# EAGLE board user_prog_pcb v67 (EAGLE 9.7.0)
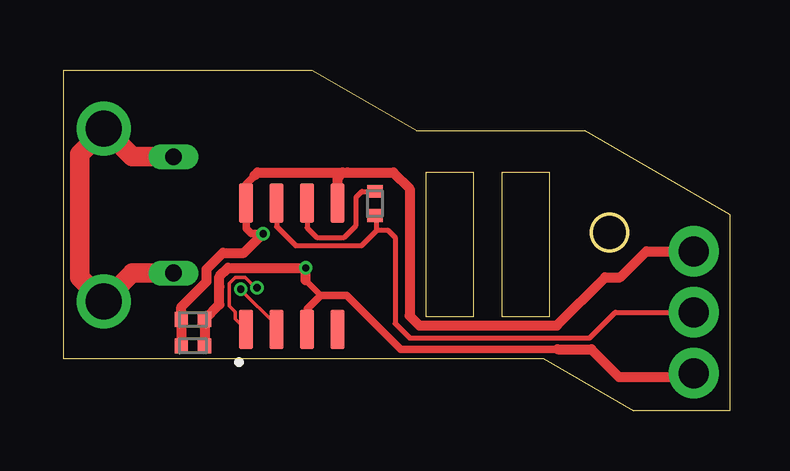
[diagram p0: board, top side]
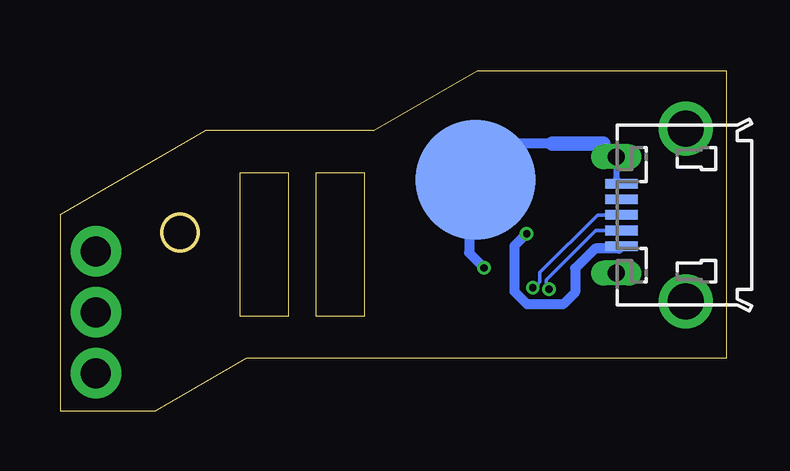
[diagram p1: board, bottom side, seen from below]

Size 27.77 x 14.18 mm. Coordinates in mm from the lower left corner, seen from the top.
Outline: 17.09,3.93 17.09,9.93 15.09,9.93 15.09,3.93 17.09,3.93
Outline: 20.26,3.93 20.26,9.93 18.26,9.93 18.26,3.93 20.26,3.93
Outline: 27.77,8.19 27.77,0 23.78,0 20,2.18 0,2.18 0,14.18 10.38,14.18 14.71,11.68 21.72,11.68 27.77,8.19
Outline: circle at 22.76,7.43 radius 0.75
Copper layers (1*16): Top 0.035mm / dielectric 1.5mm / Bottom 0.035mm
Design rules "SparkFun-2-Layer-Minimum-JLCPCB": minimum track width 5mil, minimum drill 0.3mm, track to track 5mil, track to pad 5mil, pad to pad 5mil, via to via 5mil, smd to smd 5mil, copper to edge 7mil, drill to drill 7mil, minimum pad ring 5mil, minimum via ring 5mil, stop-mask expansion 2.5mil, vias tented up to drill 25mil, thermal gap 10mil

## Footprints (pad centres in the part's own frame; a part is rotated, then mirrored left to right if it is on the bottom)
CAPC1005X60 = smd 0.56 x 0.629: 1 -0.485,0; 2 0.485,0
RESC1005X40 = smd 0.535 x 0.644: 1 -0.507,0; 2 0.507,0
1X3_POGO_PIN_HOLDER = drill 1.25 pad 2.1: P$1 -2.54,0; P$2 0,0; P$3 2.54,0
M2X2.4SMT_STANDOFF = smd 5 x 5: P$1 0,0
CH330N = smd 1.64 x 0.59: D_N -2.635,0.635; D_P -2.635,1.905; GND -2.635,-0.635; RTS# -2.635,-1.905; RXI 2.635,0.635; TXD 2.635,-0.635; V3 2.635,1.905; VCC 2.635,-1.905
ZX62D-B-5PA8 = smd 1.35 x 0.4: 1 4.825,1.3; 2 4.825,0.65; 3 4.825,0; 4 4.825,-0.65; 5 4.825,-1.3 | drill 1.5: S1 2.15,-3.6; S2 2.15,3.6 | drill 0.7 long: S3 5.05,2.425; S4 5.05,-2.425

## Placement (x,y rotation side)
C3  100nF  [CAPC1005X60]  5.4,3.81 0 top
C4  100nF  [CAPC1005X60]  5.4,2.71 0 top
R1  4.7K  [RESC1005X40]  12.98,8.64 90 top
U$1  1X3_POGO_PIN_HOLDER  [1X3_POGO_PIN_HOLDER]  26.27,4.11 90 top
U$3  M2X2.4SMT_STANDOFF  [M2X2.4SMT_STANDOFF]  10.45,9.63 0 bottom
U$6  CH330N  [CH330N]  9.52,6.02 90 top
UPDI  MICROUSB  [ZX62D-B-5PA8]  -0.46,8.17 180 bottom

## Library data of the parts
C3 C4 = MY_CAP_LIB; CATEGORY: Capacitor
R1 = resistor; CATEGORY: Resistor; SUB-CATEGORY: Fixed
U$1 U$6 UPDI = MY_CLOCK_LIB_COMPONENTS
U$3 = BIY_mycustomDevices copy

## Nets
GND: C3.2 C4.2 U$1.P$1 U$3.P$1 U$6.GND UPDI.5 UPDI.S1 UPDI.S2 UPDI.S3 UPDI.S4
N$4: R1.2 U$6.TXD
UPDI_PIN: R1.1 U$1.P$2 U$6.RXI
USB_N: U$6.D_N UPDI.2
USB_P: U$6.D_P UPDI.3
V_USB: C3.1 C4.1 U$1.P$3 U$6.V3 U$6.VCC UPDI.1

## Tracks (layer width: path | path; a pad name or v marks a point on that pad's centre or on a via)
GND  (via drill 0.3)
  Top 0.254: 10.72,4.81 10.1,5.43
  Top 0.305: U$6.GND 10.15,4.24 10.72,4.81 11.8,4.81 14.05,2.56 20.6,2.56
  Top 0.406: 20.6,2.56 22,2.56 23.15,1.41 26.11,1.41 U$1.P$1 | 10.1,5.43 v10.1,5.96 6.87,5.96 6.5,5.59 6.5,5.17 6.5,5.16 6.5,4.42 C3.2 C4.2
  Top 0.813: UPDI.S4 2.87,10.59 UPDI.S1 1.69,11.72 0.68,10.71 0.68,5.56 1.67,4.57 UPDI.S2 2.87,5.74 UPDI.S3
  Bottom 0.254: UPDI.S4 4.59,9.69 UPDI.5
  Bottom 0.406: v10.1,5.96 10.72,6.58 10.72,9.36 U$3.P$1 8.95,11.13 7.25,11.13 | UPDI.S4 5.13,11.13
  Bottom 0.61: 5.13,11.13 7.25,11.13
N$4
  Top 0.2: U$6.TXD 10.15,7.63 10.55,7.23 11.7,7.23 12.2,7.73 12.2,8.91 12.44,9.15 R1.2
UPDI_PIN
  Top 0.2: U$6.RXI 8.88,7.67 9.68,6.88 12.43,6.88 13.06,7.52 13.06,7.53 | 13.06,7.53 13.53,7.53 13.82,7.23 13.82,3.63 14.43,3.03 21.93,3.03 23,4.11 U$1.P$2 | 13.06,7.53 13.06,8.06 R1.1
USB_N  (via drill 0.3)
  Top 0.152: U$6.D_N 8.88,3.55 7.36,5.07 | 7.36,5.07 v7.39,5.07 | 7.36,5.07
  Bottom 0.152: UPDI.2 5.45,7.52 7.5,5.46 7.5,5.13 7.3,5.13 7.3,5.07 v7.39,5.07
USB_P  (via drill 0.3)
  Top 0.152: U$6.D_P 7.17,3.83 7.17,4.11 6.91,4.37 6.91,4.99 6.91,5 6.91,5.3 7.16,5.55 7.59,5.55 7.87,5.27 7.87,5.24 7.98,5.13 v8.07,5.13
  Bottom 0.152: UPDI.3 5.37,8.17 7.78,5.76 7.78,5.36 7.87,5.27 7.87,5.13 v8.07,5.13
V_USB  (via drill 0.3)
  Top 0.305: 7.97,9.81 7.62,9.45 U$6.V3 7.62,7.59 7.83,7.38 v8.32,7.38
  Top 0.406: U$1.P$3 24.29,6.65 23.2,5.56 22.57,5.56 20.57,3.55 14.83,3.55 14.43,3.96 14.43,9.26 13.75,9.93 11.85,9.93 | 7.97,9.81 8.1,9.93 11.85,9.93 | U$6.VCC 11.43,9.73 11.62,9.93 11.85,9.93 | 11.85,9.93 | C4.1 C3.1 4.92,4.33 5.97,5.39 5.97,5.9 6.65,6.58 7.53,6.58 v8.32,7.38
  Bottom 0.406: UPDI.1 4.47,6.76 5.47,6.76 6.3,5.93 6.3,4.93 6.8,4.43 8.3,4.43 8.82,4.96 8.82,6.88 v8.32,7.38